# Altium PCB PCB_RTL8367S-4GE+SFP_2024-02-06.pcbdoc
Units mm, origin at the board's own origin, x right, y up, seen from the top; angles counter-clockwise.
Board outline 139.51 x 91.6 mm, 2 copper layers (Top Layer, Bottom Layer); 84 components, 93 nets, 429 pads, 192 vias.
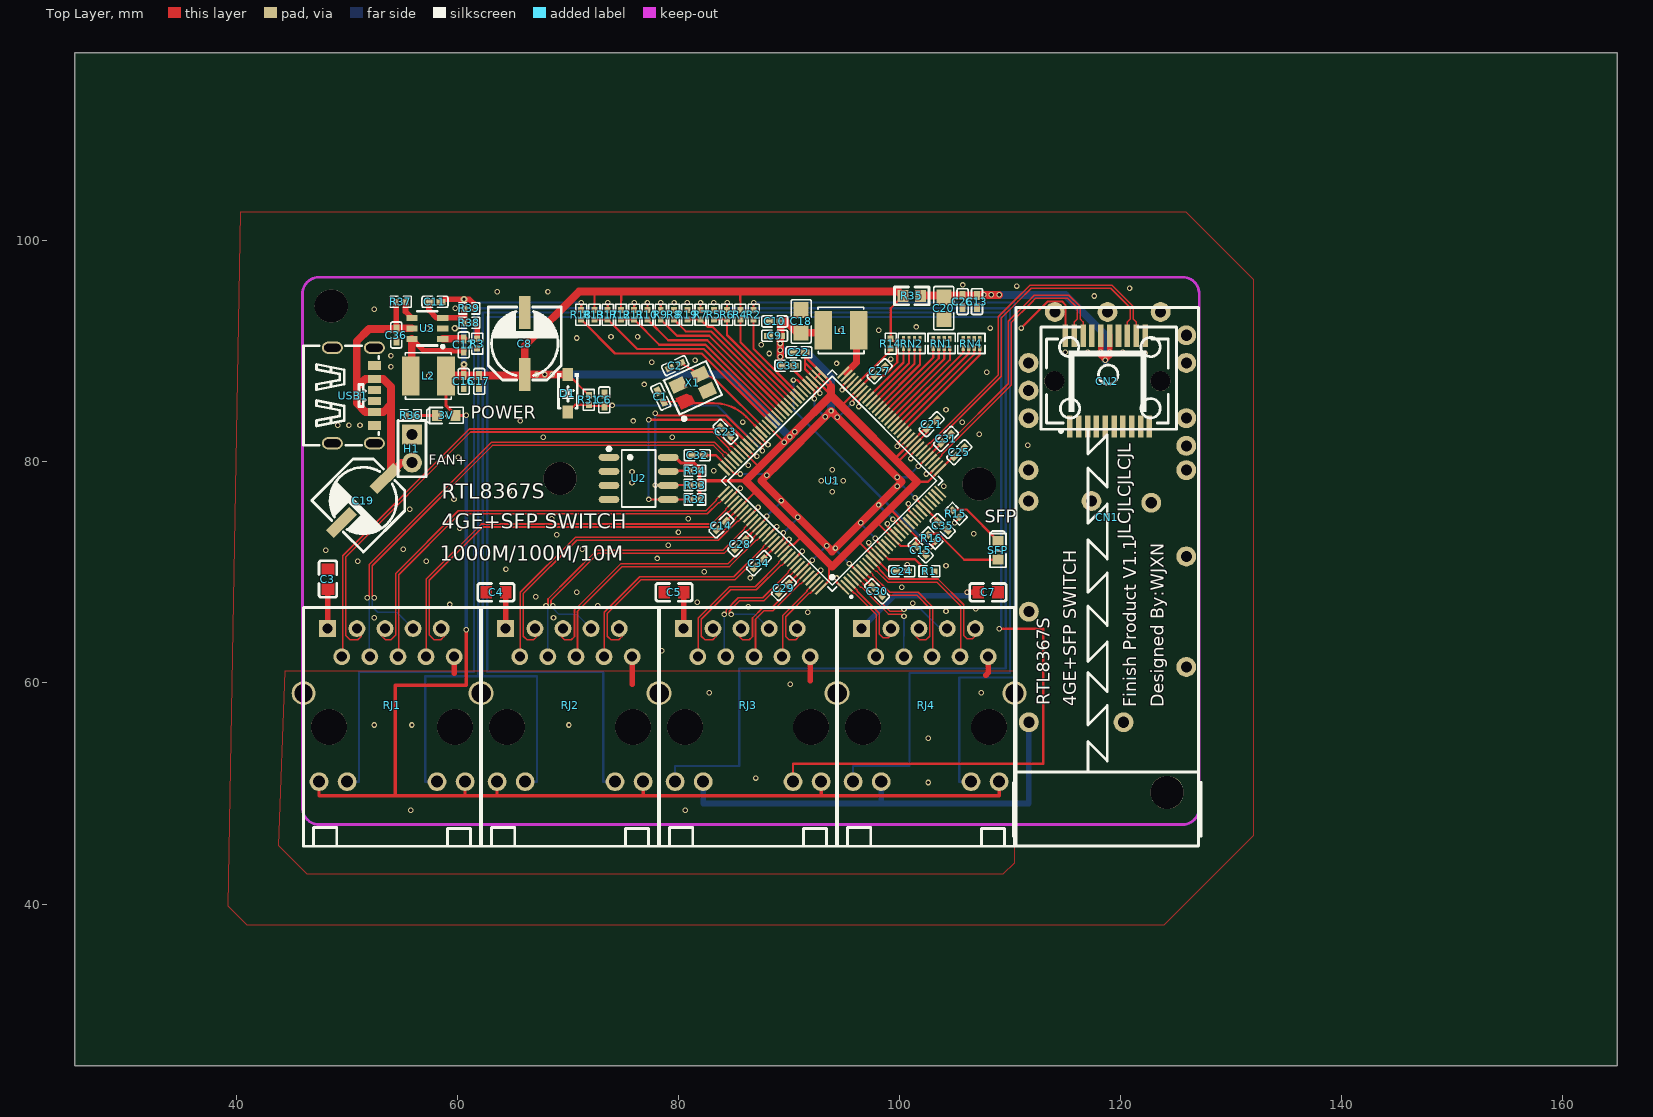
[diagram p0: Top Layer view]
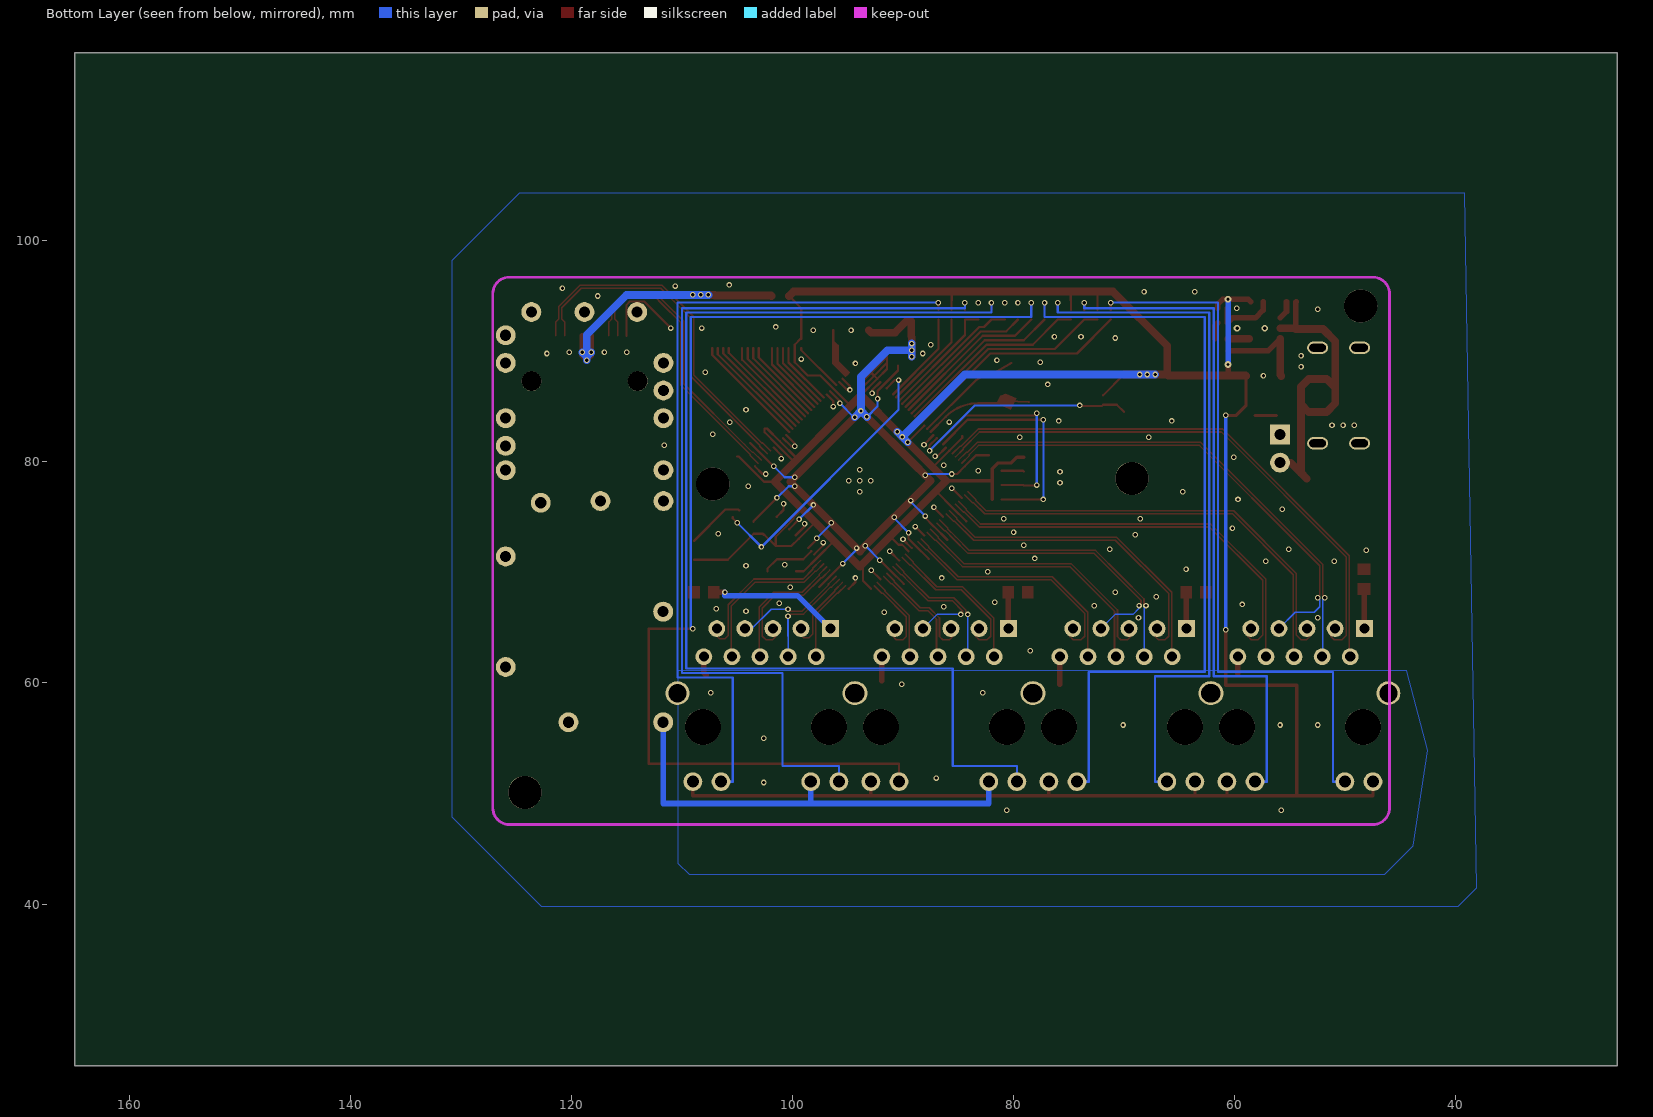
[diagram p1: Bottom Layer view, seen from below]

## Layer stack, top to bottom
Top Layer: signal copper (thickness not stored)
Dielectric: dielectric 0.32, FR-4, Dk 4.8
Bottom Layer: signal copper (thickness not stored)

## Board outline
164.909,25.4 25.4,25.4 25.4,117 164.909,117

## Components (designator, comment, footprint, x,y, rotation, side; value= is the part's Value field where it differs from the comment)
3V "LED-0603_OR" LED0603_RED 59,84.2 r180 top
C1 "22PF" C0402_NEW#1 78.4,85.9 r115 top
C2 "22PF" C0402_NEW#1 79.7,88.7 r25 top
C3 "10nf" C0603 48.3,69.4 r270 top
C4 "10nf" C0603 63.5,68.2 r0 top
C5 "10nf" C0603 79.6,68.2 r0 top
C6 "0.1uf" C0402_NEW#1 73.3,85.6 r90 top
C7 "10nf" C0603 108,68.2 r180 top
C8 "220uF" CAP-SMD_BD6.3-L6.6-W6.6-FD 66.1,90.7 r90 top
C9 "0.1uf" C0402_NEW#1 88.7,91.4 r180 top
C10 "10nf" C0402_NEW#1 88.7,92.7 r180 top
C11 "22pf" C0402_NEW#1 57.982,94.472 r180 top
C12 "22nf" C0402_NEW#1 60.582,90.572 r270 top
C13 "0.1uf" C0402_NEW#1 107,94.5 r90 top
C14 "0.1uf" C0402_NEW#2 83.89,74.24 r225 top
C15 "0.1uf" C0402_NEW#2 101.9,72 r315 top
C16 "0.1uf" C0402_NEW#1 60.582,87.272 r90 top
C17 "10nf" C0402_NEW#1 61.982,87.272 r90 top
C18 "10uf" C0805#1 91.1,92.7 r270 top
C19 "220uF" CAP-SMD_BD6.3-L6.6-W6.6-FD 51.501,76.5 r225 top
C20 "10uf" C0805#2 104,93.9 r90 top
C21 "0.1uf" C0402_NEW#2 102.9,83.4 r45 top
C22 "0.1uf" C0402_NEW#2 90.9,89.9 r180 top
C23 "0.1uf" C0402_NEW#2 84.26,82.72 r135 top
C24 "0.1uf" C0402_NEW#2 100.2,70.1 r0 top
C25 "0.1uf" C0402_NEW#2 105.39,80.87 r45 top
C26 "10nf" C0402_NEW#1 105.7,94.5 r90 top
C27 "0.1uf" C0402_NEW#2 98.2,88.2 r45 top
C28 "0.1uf" C0402_NEW#2 85.59,72.54 r225 top
C29 "0.1uf" C0402_NEW#2 89.54,68.58 r225 top
C30 "0.1uf" C0402_NEW#2 97.96,68.29 r315 top
C31 "0.1uf" C0402_NEW#2 104.2,82.08 r45 top
C32 "0.1uf" C0402_NEW#2 81.7,80.6 r180 top
C33 "0.1uf" C0402_NEW#2 89.9,88.7 r180 top
C34 "0.1uf" C0402_NEW#2 87.28,70.84 r225 top
C35 "0.1uf" C0402_NEW#2 103.9,74.2 r315 top
C36 "0.1uf" C0402_NEW#1 54.482,91.472 r90 top
CN1 "SFP_SHIELD" CONN-TH_46012-000001 118.8,75 r90 top
CN2 "KSP20LG154" CONN-SMD_20P-P0.80-H_KSPXXXXXXX-XX 118.8,87.3 r0 top
D1 "1N4148" SOD-123_L2.7-W1.6-LS3.7-RD-1 70,86.2 r270 top
H1 "FAN" HDR-TH_2P-P2.54-V-M-1 55.9,81.2 r270 top
L1 "2.2uH" IND-SMD_L4.0-W4.0 94.7,91.9 r180 top
L2 "4.7uH" IND-SMD_L4.0-W4.0 57.382,87.772 r0 top
R1 "2.49k" R0402 102.7,70.1 r180 top
R2 "470R" R0402 86.8,93.3 r270 top
R3 "2k" R0402 61.8,90.7 r270 top
R4 "4.7K" R0402 85.6,93.3 r270 top
R5 "4.7K" R0402 83.2,93.3 r270 top
R6 "470R" R0402 84.4,93.3 r270 top
R7 "470R" R0402 82,93.3 r270 top
R8 "4.7K" R0402 79.6,93.3 r270 top
R9 "470R" R0402 78.4,93.3 r270 top
R10 "470R" R0402 77.2,93.3 r270 top
R11 "470R" R0402 76,93.3 r270 top
R12 "4.7K" R0402 74.8,93.3 r270 top
R13 "4.7K" R0402 72.4,93.3 r270 top
R14 "1k" R0402 99.2,90.7 r270 top
R15 "1K" R0402 105.1,75.299 r135 top
R16 "4.7K" R0402 102.9,73.1 r315 top
R17 "470R" R0402 73.6,93.3 r270 top
R18 "470R" R0402 71.2,93.3 r270 top
R19 "4.7K" R0402 80.8,93.3 r270 top
R31 "100K" R0402 71.9,85.6 r270 top
R32 "1.5K" R0402 81.5,76.6 r0 top
R33 "1.5K" R0402 81.5,77.9 r0 top
R34 "1.5K" R0402 81.5,79.2 r0 top
R35 "0R" R0603 101.1,95 r0 top
R36 "1K" R0402 55.8,84.2 r180 top
R37 "10k" R0402 54.882,94.472 r0 top
R38 "2k" R0402 61.082,92.571 r0 top
R39 "18k" R0402 61.082,93.872 r180 top
RJ1 "HR911130A" RJ45-TH_HR911130A 54.1,58 r180 top
RJ2 "HR911130A" RJ45-TH_HR911130A 70.2,58 r180 top
RJ3 "HR911130A" RJ45-TH_HR911130A 86.3,58 r180 top
RJ4 "HR911130A" RJ45-TH_HR911130A 102.4,58 r180 top
RN1 "1kΩ" RES-ARRAY-SMD_0402-8P-L2.0-W1.0-BL 103.8,90.7 r0 top
RN2 "1kΩ" RES-ARRAY-SMD_0402-8P-L2.0-W1.0-BL 101.1,90.7 r0 top
RN4 "1kΩ" RES-ARRAY-SMD_0402-8P-L2.0-W1.0-BL 106.5,90.7 r0 top
SFP "RED" LED0603_GREEN 108.9,72 r90 top
U1 "RTL8367S-CG" LQFP-128_L14.0-W14.0-P0.40-LS16.0-BL 93.9,78.3 r45 top
U2 "24C64" SOP-8_L4.9-W3.9-P1.27-LS6.0-BL 76.4,78.5 r270 top
U3 "MT2492" SOT-23-6_L2.9-W1.6-P0.95-LS2.8-BR 57.282,92.072 r0 top
USB1 "TYPE-C 6P" TYPE-C-SMD_TYPE-C-6P 50.6,86 r270 top
X1 "25MHz" OSC-SMD_4P-L3.2-W2.5-BL 81.3,86.7 r25 top

## Footprints (in the part's own frame and the unit in brackets; to place one, negate y for a bottom-side part, rotate by r counter-clockwise, add the part's x,y. Pads: shape width x height; smd on the part's side, far side on the other; paste and mask are expansions set on the pad)
C0402_NEW#1 [mm]
  rect 0.79x0.54 smd paste-100 mask+0.051: 1(-0.545,0) 2(0.545,0)
  silkscreen extent -1.17,-0.5 1.17,0.5
C0402_NEW#2 [mm]
  rect 0.79x0.5 smd paste-100 mask+0.051: 1(-0.545,0) 2(0.545,0)
  silkscreen extent -1.17,-0.5 1.17,0.5
C0603 [mm]
  Top Layer region: 1.4,0.55 1.4,-0.55 0.4,-0.55 0.4,0.55
  Top Layer region: -0.4,-0.55 -1.4,-0.55 -1.4,0.55 -0.4,0.55
  silkscreen extent -1.65,-0.8 1.65,0.8
C0805#1 [mm]
  rect 1.41x1.35 smd paste-100 mask+0.051: 1(-1.03,0) 2(1.03,0)
  silkscreen extent -1.96,-0.9 1.96,0.9
C0805#2 [mm]
  rect 1.41x1.35 smd paste-100 mask+0.051: 1(-1,0) 2(1,0)
  silkscreen extent -1.96,-0.9 1.96,0.9
CAP-SMD_BD6.3-L6.6-W6.6-FD [mm]
  rect 3x1 smd paste+0 mask+0.102: 1(-2.8,0) 2(2.8,0)
  silkscreen extent -3.3,-3.3 3.3,3.3
CONN-SMD_20P-P0.80-H_KSPXXXXXXX-XX [mm]
  rect 0.5x2 smd paste+0 mask+0.051: 1(-3.4,-4.1) 2(-2.6,-4.1) 3(-1.8,-4.1) 4(-1,-4.1) 5(-0.2,-4.1) 6(0.6,-4.1) 7(1.4,-4.1) 8(2.2,-4.1) 9(3,-4.1) 10(3.8,-4.1) 11(3.4,4.1) 12(2.6,4.1) 13(1.8,4.1) 14(1,4.1) 15(0.2,4.1) 16(-0.6,4.1) 17(-1.4,4.1) 18(-2.2,4.1) 19(-3,4.1) 20(-3.8,4.1)
  round 1.8 hole 1.8 unplated paste+0: ""(-4.8,0) ""(4.8,0)
  silkscreen extent -5.5,-4.64 5.5,3.8
CONN-TH_46012-000001 [mm]
  round 1.8 hole 1 paste+0 mask+0.051: 1(-18.55,7.11) 2(-8.55,7.11) 3(1.45,7.131) 4(4.25,7.132) 5(8.95,7.129) 6(11.45,7.13) 7(13.95,7.13) 8(18.55,4.76) 9(18.55,-0.011) 10(18.55,-4.811) 11(16.45,-7.131) 12(13.95,-7.131) 13(8.95,-7.131) 14(6.45,-7.131) 15(4.25,-7.131) 16(-3.55,-7.131) 17(-13.55,-7.131) 18(-18.55,-1.461) 19(1.3,-3.961) 20(1.45,1.439)
  silkscreen extent -29.75,-8.49 18.95,8.5
HDR-TH_2P-P2.54-V-M-1 [mm]
  rect 1.8x1.8 hole 1 paste+0 mask+0.051: 1(-1.27,0)
  round 1.8 hole 1 paste+0 mask+0.051: 2(1.27,0)
  silkscreen extent -2.54,-1.27 2.54,1.27
IND-SMD_L4.0-W4.0 [mm]
  rect 1.6x3.5 smd paste+0 mask+0.051: 1(-1.6,0) 2(1.6,0)
  silkscreen extent -2.08,-2.1 2.08,2.1
LED0603_GREEN [mm]
  rect 0.9x1 smd paste+0 mask+0.051: 1(-0.85,0) 2(0.85,0)
  silkscreen extent -1.54,-0.73 1.75,0.73
LED0603_RED [mm]
  rect 0.9x1 smd paste+0 mask+0.051: 1(-0.85,0) 2(0.85,0)
  silkscreen extent -1.54,-0.73 1.75,0.73
LQFP-128_L14.0-W14.0-P0.40-LS16.0-BL [mm]
  rect 0.2x1.46 smd paste+0 mask+0.051: 1(-6.2,-7.63) 2(-5.8,-7.63) 3(-5.4,-7.63) 4(-5,-7.63) 5(-4.6,-7.63) 6(-4.2,-7.63) 7(-3.8,-7.63) 8(-3.4,-7.63) 9(-3,-7.63) 10(-2.6,-7.63) 11(-2.2,-7.63) 12(-1.8,-7.63) 13(-1.4,-7.63) 14(-1,-7.63) 15(-0.6,-7.63) 16(-0.2,-7.63) 17(0.2,-7.63) 18(0.6,-7.63) 19(1,-7.63) 20(1.4,-7.63) 21(1.8,-7.63) 22(2.2,-7.63) 23(2.6,-7.63) 24(3,-7.63) 25(3.4,-7.63) 26(3.8,-7.63) 27(4.2,-7.63) 28(4.6,-7.63) 29(5,-7.63) 30(5.4,-7.63) 31(5.8,-7.63) 32(6.2,-7.63) 65(6.2,7.63) 66(5.8,7.63) 67(5.4,7.63) 68(5,7.63) 69(4.6,7.63) 70(4.2,7.63) 71(3.8,7.63) 72(3.4,7.63) 73(3,7.63) 74(2.6,7.63) 75(2.2,7.63) 76(1.8,7.63) 77(1.4,7.63) 78(1,7.63) 79(0.6,7.63) 80(0.2,7.63) 81(-0.2,7.63) 82(-0.6,7.63) 83(-1,7.63) 84(-1.4,7.63) 85(-1.8,7.63) 86(-2.2,7.63) 87(-2.6,7.63) 88(-3,7.63) 89(-3.4,7.63) 90(-3.8,7.63) 91(-4.2,7.63) 92(-4.6,7.63) 93(-5,7.63) 94(-5.4,7.63) 95(-5.8,7.63) 96(-6.2,7.63)
  rect 1.46x0.2 smd paste+0 mask+0.051: 33(7.63,-6.2) 34(7.63,-5.8) 35(7.63,-5.4) 36(7.63,-5) 37(7.63,-4.6) 38(7.63,-4.2) 39(7.63,-3.8) 40(7.63,-3.4) 41(7.63,-3) 42(7.63,-2.6) 43(7.63,-2.2) 44(7.63,-1.8) 45(7.63,-1.4) 46(7.63,-1) 47(7.63,-0.6) 48(7.63,-0.2) 49(7.63,0.2) 50(7.63,0.6) 51(7.63,1) 52(7.63,1.4) 53(7.63,1.8) 54(7.63,2.2) 55(7.63,2.6) 56(7.63,3) 57(7.63,3.4) 58(7.63,3.8) 59(7.63,4.2) 60(7.63,4.6) 61(7.63,5) 62(7.63,5.4) 63(7.63,5.8) 64(7.63,6.2) 97(-7.63,6.2) 98(-7.63,5.8) 99(-7.63,5.4) 100(-7.63,5) 101(-7.63,4.6) 102(-7.63,4.2) 103(-7.63,3.8) 104(-7.63,3.4) 105(-7.63,3) 106(-7.63,2.6) 107(-7.63,2.2) 108(-7.63,1.8) 109(-7.63,1.4) 110(-7.63,1) 111(-7.63,0.6) 112(-7.63,0.2) 113(-7.63,-0.2) 114(-7.63,-0.6) 115(-7.63,-1) 116(-7.63,-1.4) 117(-7.63,-1.8) 118(-7.63,-2.2) 119(-7.63,-2.6) 120(-7.63,-3) 121(-7.63,-3.4) 122(-7.63,-3.8) 123(-7.63,-4.2) 124(-7.63,-4.6) 125(-7.63,-5) 126(-7.63,-5.4) 127(-7.63,-5.8) 128(-7.63,-6.2)
  silkscreen extent -7.08,-8.76 7.08,7.08
OSC-SMD_4P-L3.2-W2.5-BL [mm]
  rect 1.4x1.15 smd paste+0 mask+0.102: 2(1.1,-0.8) 3(1.1,0.8) 4(-1.1,0.8)
  Top Layer region: -1.8,-0.225 -0.762,-0.225 -0.4,-0.604 -0.4,-1.375 -1.8,-1.375
  silkscreen extent -2.1,-2.35 2.1,1.7
R0402 [mm]
  rect 0.566x0.54 smd paste-100 mask+0.051: 1(-0.433,0) 2(0.433,0)
  silkscreen extent -0.94,-0.5 0.94,0.5
R0603 [mm]
  rect 1x1.1 smd paste+0 mask+0.102: 1(-0.8,0) 2(0.8,0)
  silkscreen extent -1.55,-0.8 1.55,0.81
RES-ARRAY-SMD_0402-8P-L2.0-W1.0-BL [mm]
  rect 0.3x0.505 smd paste+0 mask+0.051: 1(-0.75,0.427) 2(-0.25,0.427) 3(0.25,0.427) 4(0.75,0.427) 5(0.75,-0.428) 6(0.25,-0.428) 7(-0.25,-0.428) 8(-0.75,-0.428)
  silkscreen extent -1.23,-0.91 1.23,0.91
RJ45-TH_HR911130A [mil]
  round 66.93 hole 43.31 paste+0 mask+2: 11(260,272.62) 12(160,272.62) 13(-160,272.62) 14(-260,272.62)
  rect 60x60 hole 35.83 paste+0 mask+2: P1(229.63,-272.62)
  round 60 hole 35.83 paste+0 mask+2: P2(179.1,-172.38) P3(125.2,-272.38) P4(79.1,-172.38) P5(25.2,-272.38) P6(-20.9,-172.38) P7(-74.8,-272.38) P8(-120.9,-172.38) P9(-174.8,-272.38) P10(-220.9,-172.38)
  round 85 hole 65 paste+0 mask+2: SHIELD0(-315,-42.48) SHIELD1(315,-42.48)
  round 127.95 hole 127.95 unplated paste+0: ""(-224.4,77.62) ""(224.4,77.62)
  silkscreen extent -315,-347 315,503
SOD-123_L2.7-W1.6-LS3.7-RD-1 [mm]
  rect 1.2x0.95 smd paste+0 mask+0.051: 1(-1.7,0) 2(1.7,0)
  silkscreen extent -1.81,-0.98 1.35,0.98
SOP-8_L4.9-W3.9-P1.27-LS6.0-BL [mm]
  oval 0.63x1.865 smd paste+0 mask+0.051: 1(-1.905,-2.682) 2(-0.635,-2.682) 3(0.635,-2.682) 4(1.905,-2.682) 5(1.905,2.682) 6(0.635,2.682) 7(-0.635,2.682) 8(-1.905,2.682)
  silkscreen extent -2.82,-2.83 2.58,1.52
SOT-23-6_L2.9-W1.6-P0.95-LS2.8-BR [mm]
  rect 1x0.55 smd paste+0 mask+0.051: 1(1.4,-0.95) 2(1.4,0) 3(1.4,0.95) 4(-1.4,0.95) 5(-1.4,0) 6(-1.4,-0.95)
  silkscreen extent -0.9,-1.78 1.52,1.55
TYPE-C-SMD_TYPE-C-6P [mm]
  oval 1.1x1.9 hole 0.7 slot 1.5 at 90 deg paste+0 mask+0.051: 7(-4.32,-1.9) 7(-4.32,1.9) 7(4.32,-1.9) 7(4.32,1.9)
  rect 0.7x1.2 smd paste-100 mask+0.051: A5(-0.5,1.9) A9(1.5,1.9) B5(0.5,1.9) B9(-1.5,1.9)
  rect 0.8x1.2 smd paste-100 mask+0.051: A12(2.7,1.9) B12(-2.7,1.9)
  silkscreen extent -4.5,-4.5 4.5,2.3

## Free pads (board coordinates)
  round 3 hole 3 unplated paste+0: ""(48.6,94.1) ""(69.3,78.5) ""(107.2,78) ""(124.2,50.1)

## Via types
v1: diameter 0.5, hole 0.305, Top Layer to Bottom Layer, tented both sides, 128 vias
v2: diameter 0.5, hole 0.3, Top Layer to Bottom Layer, tented both sides, 60 vias
v3: diameter 0.61, hole 0.305, Top Layer to Bottom Layer, tented both sides, 4 vias

## Nets (pads, with @x,y where several pads share a name; then routed paths per layer and width w, separated by ;. In a path a pad name is that pad's centre, name@x,y a point inside that pad or via, vN(x,y) a via of type N, cw(c..) or ccw(c..) an arc to the next point about the centre after c; other vN are vias at no path point)
1V1: C9.1 C10.1 C18.2 C28.1 C29.1 C30.1 C31.1 C32.1 C33.1 C34.1 C35.1 L1.2 U1.6 U1.14 U1.20 U1.27 U1.37 U1.58 U1.69 U1.95 U1.108 U1.114 U1.122 | length 107.2
  Top Layer w0.2: C32.1 83.397,80.6 U1.95 ; U1.95 85.098,78.9 v2(85.6,78.9) ; C28.1@85.976,72.924 U1.108@87.231,74.176 ; U1.108 88,74.946 v2(88,75.1) ; C34.1 U1.114@88.928,72.48 ; U1.114 89.5,73.051 v2(89.5,73.6) ; C29.1@89.926,68.964 U1.122@91.191,70.217 ; C33.1 90.445,88.26 U1.69 92.3,86.405 v2(92.3,85.7) ; U1.122 92.074,71.1 v2(92.1,71.1) ; v2@95.4,70.8 v2(95.461,70.8) U1.6@96.325,69.935 ; v2(95.7,85.3) 95.7,85.474 U1.58 ; U1.6 C30.1@97.574,68.675 ; v2(97.8,73.1) 97.8,72.986 U1.14 ; v2@99.4,74.799 U1.20 ; v2@101.4,76.8 v2(101.4,76.74) U1.27 103.514,74.625 C35.1 ; v2(101.7,79.6) 101.705,79.6 U1.37 ; U1.37 C31.1
  Top Layer w0.7: v2(88,78.8) 89,79.8 ; v2@88.001,78.799 87.5,78.299 93.899,71.901 100.2,78.2 v2(94.356,84.045) v2(93.8,84.601) v2(93.264,84.065) 88.999,79.8 ; v2(89.2,89.5) 89.2,91.245 C9.1 89.245,92.5 C10.1 ; C10.1 89.7,92.701 90.729,91.669 91.1,91.669 92.87,91.67 L1.2@93.1,91.9
  Bottom Layer w0.2: v2(85.6,78.9) 87.9,78.9 v2(88,78.8) ; v2(88,75.1) 89.3,76.4 v2(89.3,76.5) ; v2(89.5,73.6) 90.8,74.9 v2(90.8,75) ; v2(92.1,71.1) v2(93.4,72.4) ; v2(92.3,85.7) 92.301,85.03 v2@93.264,84.065 ; v2(94.2,72.2) 94.2,72.061 v2(95.461,70.8) ; v2(94.356,84.045) 94.445,84.045 v2(95.7,85.3) ; v2(96.5,74.5) 96.5,74.4 v2(97.8,73.1) ; v2(98.1,76.1) v2(99.4,74.8) ; v2(99.8,77.8) 100.34,77.8 v2(101.4,76.74) ; v2(99.8,78.6) 100.7,78.6 v2@101.7,79.6
  Bottom Layer w0.7: v2(89.2,89.5) 89.2,89.7 v2(89.2,90.7) ; v2(89.2,90.1) 91.399,90.1 93.8,87.699 v2(93.8,84.601) ; v2(93.264,84.065) v2(93.8,84.601) ; v2(94.356,84.045) v2(93.8,84.601)
3V3: 3V.1 C8.1 C11.1 C14.1 C15.1 C16.2 C17.2 C21.1 C22.1 C23.1 C24.1 C25.1 C27.1 D1.1 L2.2 R4.1 R12.1 R13.1 R14.1 R16.1 R31.1 R32.2 R33.2 R34.2 R35.1 R39.1 RJ1.11 RJ1.14 RJ2.11 RJ2.14 RJ3.14 RJ4.14 SFP.1 U1.11 U1.17 U1.21 U1.33 U1.41 U1.42 U1.59 U1.65 U1.66 U1.67 U1.82 U1.90 U1.102 U1.116 U1.128 U2.8 | length 350.7
  Top Layer w0.2: D1.1 70.033,87.9 R31.1 ; R13.1@72.4,93.732 72.413,95.401 ; R12.1@74.8,93.732 74.821,95.401 ; C14.1 U1.102 ; C23.1 84.645,82.18 U1.90 87.228,79.597 87.399,79.597 ; U1.102 86.95,77.29 87.11,77.29 ; 85.585,95.401 R4.1@85.6,93.732 ; U1.82 89.535,81.817 v1@89.535,81.734 ; U1.116 90.08,72.5 90.4,72.5 91.067,73.167 91.067,73.333 ; U1.128 93.626,69.258 93.626,70.774 ; 93.8,86.8 93.8,87.168 U1.65 ; 94.739,85.063 U1.59 ; 96.227,72.829 96.26,72.829 U1.11 98.989,70.1 C24.1 ; U1.59 97.475,87.814 C27.1 ; C27.1@97.815,87.814 98.615,87.814 99.799,89 99.799,90.6 99.266,91.133 R14.1 ; 97.897,74.498 97.985,74.498 U1.17 100.097,72.385 C15.1 ; 99.076,75.677 99.223,75.677 99.9,75 99.9,74.846 U1.21 101.515,73.231 C15.1 ; R14.1 99.2,93.9 R35.1 ; 99.628,80.171 99.628,80.351 U1.42 102.291,83.014 C21.1 102.515,82.672 U1.41 99.946,80.103 99.697,80.103 ; 101.6,78.2 102.568,78.2 103.679,79.311 104.852,80.484 C25.1 ; SFP.1 105.85,71.15 103.5,73.5 102.688,73.5 R16.1 102.535,73.406 C15.1 ; C22.1 91.445,88.391 U1.67 ; C22.1 91.445,88.957 92.606,87.796 93.8,86.603 93.8,86 93.8,86.037 U1.67 ; C22.1 91.445,89.523 U1.65 ; U1.67 U1.65
  Top Layer w0.3: RJ1.11 47.495,49.8 109.004,49.8 RJ4.14 ; 56.274,49.8 54.399,49.8 54.399,59.8 60.8,59.8 v1(60.8,64.8) ; 58.715,49.8 60.703,49.8 RJ1.14 ; L2.2 58.982,85.068 3V.1 v1(60.8,84.2) ; 62.832,49.8 63.596,49.8 RJ2.11 ; 75.804,49.8 76.804,49.8 RJ2.14 ; U2.8 79.695,80.404 80.2,79.899 81.399,79.899 81.933,79.368 R34.2 ; R32.2 R34.2 ; R33.2 81.933,78.299 86.101,78.299 ; 92.144,49.8 92.903,49.8 RJ3.14
  Top Layer w0.5: C11.1@58.527,94.471 58.755,94.7 61.1,94.7 61.514,94.286 R39.1@61.514,93.872 ; v3@60.599,88.799 60.599,87.816 C17.2@61.981,87.816
  Top Layer w0.7: L2.2 59.027,87.817 C17.2 66.017,87.817 C8.1 ; D1.1 v1(68.6,87.9) C8.1 66.101,90.501 71.001,95.401 99.901,95.401 R35.1@100.299,94.999 ; 93.8,86.8 93.8,86 ; 93.8,86 101.6,78.2 93.899,70.501 86.101,78.299 v1(89.563,81.762) v1(90.052,82.251) v1(90.532,82.731) 93.8,86
  Bottom Layer w0.3: v1(60.8,64.8) v1(60.8,84.2)
  Bottom Layer w0.5: v3(60.6,88.8) v3(60.6,94.7)
  Bottom Layer w0.7: v1(67.2,87.9) v1(67.9,87.9) v1(68.6,87.9) 84.403,87.9 v1(90.052,82.251) ; v1@89.563,81.761 v1(90.532,82.731)
GND: C1.2 C2.1 C6.2 C8.2 C9.2 C10.2 C13.1 C14.2 C15.2 C16.1 C17.1 C18.1 C19.2 C20.1 C21.2 C22.2 C23.2 C24.2 C25.2 C26.1 C27.2 C28.2 C29.2 C30.2 C31.2 C32.2 C33.2 C34.2 C35.2 C36.1 CN1.1 CN1.2 CN1.3 CN1.4 CN1.5 CN1.6 CN1.7 CN1.8 CN1.9 CN1.10 CN1.11 CN1.12 CN1.13 CN1.14 CN1.15 CN1.16 CN1.17 CN1.18 CN1.19 CN1.20 CN2.1 CN2.3 CN2.6 CN2.9 CN2.10 CN2.11 CN2.14 CN2.17 CN2.20 H1.1 R1.1 R3.2 R5.1 R8.1 R19.1 R36.2 RJ3.12 RJ4.12 RN1.1 RN1.2 RN1.3 RN1.4 RN2.1 RN2.2 RN2.3 RN2.4 RN4.1 RN4.2 RN4.3 RN4.4 U1.1 U1.12 U1.18 U1.24 U1.32 U1.34 U1.40 U1.43 U1.44 U1.57 U1.61 U1.62 U1.68 U1.85 U1.89 U1.96 U1.99 U1.105 U1.111 U1.115 U1.119 U1.125 U2.1 U2.2 U2.3 U2.4 U3.2 USB1.7 USB1.A12 USB1.B12 X1.2 X1.4 | length 76.5
  Top Layer w0.19: v1(111,92.1) 113.401,94.499 114.699,94.499 114.998,94.199 CN2.20@114.998,91.4
  Top Layer w0.2: U1.99 85.563,77.6 v2(85.6,77.6) ; U1.89 86.892,80.5 v2(87.1,80.5) ; U1.105 87.2,75.843 v2(87.2,75.9) ; U1.85 v2(88.1,81.554) v2@88.1,81.5 ; U1.111 v2(88.9,74.148) v2@88.9,74.2 ; U1.115 90,72.986 v2(90,73) ; U1.119 91.177,71.9 v2(91.2,71.9) ; U1.125 v2(92.871,70.2) v2@92.9,70.2 ; U1.68 92.8,86.471 v2(92.8,86.2) ; v2(94.3,69.5) 94.3,69.132 U1.1 ; U1.62 94.8,86.837 v2(94.8,86.5) 95.029,86.5 U1.61 ; v2(96.3,85) 96.3,85.508 U1.57 ; v2(97.2,72.7) 97.2,72.454 U1.12 ; v2(98.9,74.4) 98.9,74.148 U1.18 ; U1.44 99.8,81.654 v2(99.8,81.4) 100.111,81.4 U1.43 ; v2(100.8,76.2) 100.8,75.643 U1.24 ; v2(101,80.3) 101,80.592 U1.40 ; v2(102.4,78.9) 102.703,78.9 U1.34
  Bottom Layer w0.5: RJ3.12 82.235,49.099 98.336,49.099 ; CN1.1 111.689,49.099 98.336,49.099 ; 98.336,49.099 RJ4.12 98.336,49.099
  other v1: 78.5,62.9 52.5,65.9 68.7,65.9 91.7,66.4 104.2,66.5 106.9,66.7 86.3,66.9 72.7,67 59.3,67.1 101.2,67.2 81.7,67.3 67.1,67.8 70.8,68.2 100.19,68.67 86.5,69.5 82.33,70.06 64.4,70.3 104.2,70.6 100.7,70.7 51,71 57.2,71 78.07,71.26 48.1,72 55.1,72.1 71.3,72.1 79.08,72.45 69,73.4 106.7,73.5 80,73.64 60.2,74 68.55,74.84 80.88,74.84 55.7,75.7 59.7,76.6 64.7,77.3 93.9,77.3 104,77.8 75.8,78.1 92.9,78.3 93.9,78.3 94.9,78.3 75.8,79.1 83.2,79.2 93.9,79.3 86.3,79.7 60.1,80.4 111.6,81.5 67.78,82.22 79.448,82.215 107.2,82.5 49.2,83.3 50.2,83.3 51.2,83.3 105.68,83.57 85.8,83.6 65.7,83.7 75.9,83.7 104.2,84.7 76.9,87 57.4,87.8 107.9,88.1 54,88.6 94.3,88.9 77.6,89 81.5,89.2 99.2,89.3 54,89.6 88.2,89.8 122.2,89.8 115,89.9 117,89.9 120.2,89.9 87.5,90.6 70.8,91.2 73.9,91.3 76.3,91.3 94.7,91.9 98.1,91.9 108.2,92.1 101.5,92.2 52.5,93.8 59.8,93.9 79.6,94.4 80.8,94.4 83.2,94.4 117.6,95 63.6,95.4 68.2,95.4 120.8,95.7 110.6,95.9 105.7,96
  other v3: 57.282,92.072 59.782,92.072
HSI_N: CN2.12 U1.39 | length 32
  Top Layer w0.142: U1.39 102.678,81.704 102.768,81.704 103.487,82.422 108.928,87.863 108.928,92.4 108.928,93.113 110.428,94.613 111.787,95.972 113.8,95.972 119.21,95.972 121.136,94.047 121.136,92.918 121.4,92.654 CN2.12
HSI_P: CN2.13 U1.38 | length 31.3
  Top Layer w0.142: U1.38 102.961,81.421 102.961,81.511 103.679,82.23 109.2,87.751 109.2,92.4 109.2,93 110.7,94.5 111.9,95.7 113.8,95.7 119.098,95.7 120.864,93.934 120.864,92.918 120.6,92.654 CN2.13
HSO_N: CN2.19 U1.35 | length 25.5
  Top Layer w0.142: U1.35 103.809,80.572 103.809,80.663 104.528,81.381 110.1,86.954 110.1,92.4 110.1,92.6 111.9,94.4 112.3,94.8 114.8,94.8 115.198,94.8 116.064,93.934 116.064,92.918 115.8,92.654 CN2.19
HSO_P: CN2.18 U1.36 | length 26.2
  Top Layer w0.142: U1.36@102.831,80.16 103.526,80.855 103.617,80.855 104.335,81.574 109.828,87.066 109.828,92.4 109.828,92.713 111.628,94.513 112.187,95.072 114.8,95.072 115.31,95.072 116.336,94.046 116.336,92.918 116.6,92.654 CN2.18
L2_1: C12.2 L2.1 U3.6 | length 8.5
  Top Layer w0.5: U3.6 56.977,90.027 C12.2
  Top Layer w0.7: L2.1 55.882,87.872 U3.6
NRST: C6.1 D1.2 R31.2 U1.86 | length 21
  Top Layer w0.2: D1.2 70.667,85.167 R31.2 72.012,85.055 C6.1 73.955,85.055 v1(74,85.1) ; U1.86 87.6,81.489 v2(87.6,81)
  Bottom Layer w0.2: v1(74,85.1) 83.5,85.1 v2(87.6,81)
P0_LED_G-: R18.1 RJ1.12 | length 65.2
  Top Layer w0.2: R18.1 v1(71.2,94.4)
  Bottom Layer w0.2: RJ1.12 51.1,51.075 51.1,60.999 61.501,60.999 61.501,94.4 v1(71.2,94.4)
P0_LED_Y-: R17.1 RJ1.13 | length 61.6
  Top Layer w0.2: R17.1 v1(73.6,94.4)
  Bottom Layer w0.2: RJ1.13 57.099,51.075 57.099,60.6 61.9,60.6 61.9,93.899 73.599,93.899 v1(73.6,94.4)
P0A_RJ45_N: RJ1.P3 U1.92 | length 50.8
  Top Layer w0.142: RJ1.P3 51.082,64.918 51.3,64.7 51.3,64.199 51.001,63.9 50.3,63.9 49.901,64.301 49.901,71.4 61.199,82.701 83.086,82.701 84.557,81.23 84.557,81.139 U1.92
P0A_RJ45_P: RJ1.P2 U1.91 | length 50.9
  Top Layer w0.142: RJ1.P2 49.4,62.528 49.4,62.8 49.629,63.028 49.629,71.512 61.087,82.972 83.198,82.972 84.75,81.42 84.838,81.42 U1.91@85.534,80.725
P0B_RJ45_N: RJ1.P7 U1.94 | length 46
  Top Layer w0.142: v2(52.479,67.7) 52.3,67.879 52.3,70.6 53.8,72.1 63.183,81.483 83.17,81.483 83.272,81.381 83.991,80.663 83.991,80.572 U1.94
  Bottom Layer w0.142: v2@52.479,67.699 52.301,67.522 52.301,66.899 52.799,66.399 54.519,66.399 RJ1.P7
P0B_RJ45_P: RJ1.P4 U1.93 | length 46.8
  Top Layer w0.142: v2(51.849,67.7) 52.028,67.879 52.028,70.713 53.687,72.372 63.07,81.755 83.283,81.755 83.464,81.574 84.183,80.855 84.273,80.855 U1.93
  Bottom Layer w0.142: v2@51.849,67.699 52.027,67.522 52.027,62.972 52.199,62.8 52.199,62.487 RJ1.P4
P0C_RJ45_N: RJ1.P6 U1.98 | length 40.2
  Top Layer w0.142: RJ1.P6 54.63,62.47 54.501,62.599 54.501,62.701 54.699,62.899 54.699,69.8 60.2,75.299 82.606,75.299 83.617,76.31 83.708,76.31 U1.98
P0C_RJ45_P: RJ1.P5 U1.97 | length 40.8
  Top Layer w0.142: RJ1.P5 53.101,64.557 53.101,64.301 53.5,63.9 54,63.9 54.427,64.329 54.427,69.912 60.086,75.571 82.494,75.571 83.424,76.503 83.424,76.592 U1.97@84.12,77.288
P0D_RJ45_N: RJ1.P9 U1.101 | length 38
  Top Layer w0.142: RJ1.P9 58.801,64.659 58.801,64.199 58.501,63.9 57.899,63.9 57.473,64.329 57.473,69.287 62.293,74.108 83.111,74.108 84.465,75.462 84.557,75.462 U1.101
P0D_RJ45_P: RJ1.P8 U1.100 | length 38
  Top Layer w0.142: RJ1.P8 56.901,62.65 57.201,62.95 57.201,69.401 62.179,74.38 82.997,74.38 84.272,75.655 84.272,75.744 U1.100@84.971,76.44
P1_LED_G-: R11.1 RJ2.12 | length 63.7
  Top Layer w0.2: R11.1 v1(76,94.4)
  Bottom Layer w0.2: RJ2.12 67.201,51.075 67.201,60.6 62.301,60.6 62.301,93.501 75.999,93.501 v1(76,94.4)
P1_LED_Y-: R10.1 RJ2.13 | length 70.1
  Top Layer w0.2: R10.1 v1(77.2,94.4)
  Bottom Layer w0.2: RJ2.13 73.2,51.075 73.2,60.999 62.7,60.999 62.7,93.099 77.201,93.099 v1(77.2,94.4)
P1A_RJ45_N: RJ2.P3 U1.104 | length 29.3
  Top Layer w0.142: RJ2.P3 67.201,64.738 67.201,64.199 66.901,63.9 66.299,63.9 65.971,64.227 65.971,68.088 70.792,72.909 83.609,72.909 85.313,74.613 85.405,74.613 U1.104
P1A_RJ45_P: RJ2.P2 U1.103 | length 29.2
  Top Layer w0.142: RJ2.P2 65.499,62.53 65.499,62.701 65.7,62.899 65.7,68.2 70.681,73.181 83.497,73.181 85.123,74.806 85.123,74.895 U1.103@85.819,75.591
P1B_RJ45_N: RJ2.P7 U1.107 | length 26.4
  Top Layer w0.142: v2(68.651,67) 68.472,67.179 68.472,67.487 70.413,69.428 72.703,71.718 76.66,71.718 84.116,71.718 85.444,73.046 86.163,73.764 86.253,73.764 U1.107
  Bottom Layer w0.142: v2(68.651,67) 68.651,66.749 69.2,66.201 70.818,66.201 RJ2.P7
P1B_RJ45_P: RJ2.P4 U1.106 | length 27
  Top Layer w0.142: v2(68.021,67) 68.2,67.179 68.2,67.6 70.3,69.7 72.59,71.99 76.66,71.99 84.003,71.99 85.252,73.238 85.97,73.957 85.97,74.047 U1.106
  Bottom Layer w0.142: v2(68.021,67) 68.199,66.821 68.199,62.899 68.4,62.701 68.4,62.586 RJ2.P4
P1C_RJ45_N: RJ2.P6 U1.110 | length 24.2
  Top Layer w0.142: RJ2.P6 70.599,62.51 70.599,62.599 70.871,62.871 70.871,66.488 74.912,70.529 84.625,70.529 87.013,72.917 87.102,72.917 U1.110
P1C_RJ45_P: RJ2.P5 U1.109 | length 24.6
  Top Layer w0.142: RJ2.P5 69.4,64.758 69.4,64.199 69.7,63.9 70.3,63.9 70.599,64.199 70.599,66.6 74.8,70.801 84.511,70.801 86.82,73.107 86.82,73.198 U1.109
P1D_RJ45_N: RJ2.P9 U1.113 | length 22.2
  Top Layer w0.142: RJ2.P9 74.899,64.659 74.899,64.199 74.6,63.9 73.899,63.9 73.571,64.227 73.571,66.287 76.611,69.328 85.12,69.328 87.861,72.068 87.95,72.068 U1.113
P1D_RJ45_P: RJ2.P8 U1.112 | length 22
  Top Layer w0.142: RJ2.P8 73.101,62.548 73.101,62.8 73.299,63 73.299,66.399 76.5,69.599 85.009,69.599 87.668,72.259 87.668,72.35 U1.112
P2_LED_G+: R7.1 RJ3.11 | length 101.5
  Top Layer w0.2: R7.1 v1(82,94.4)
  Bottom Layer w0.2: RJ3.11 79.695,52.5 85.499,52.5 85.499,61.301 109.601,61.301 109.601,93.501 82.001,93.501 v1@82.001,94.4
P2_LED_Y-: R9.1 RJ3.13 | length 101.6
  Top Layer w0.2: R9.1 v1(78.4,94.4) ; RJ3.13 90.363,52.701 112.999,52.701 112.999,64.9 v1(109,64.9)
  Bottom Layer w0.2: v1(78.4,94.4) 78.4,93.1 109.2,93.1 109.2,64.9 v1(109,64.9)
P2A_RJ45_N: RJ3.P3 U1.118 | length 14.3
  Top Layer w0.142: RJ3.P3 83.401,64.639 83.401,64.199 83.101,63.9 82.4,63.9 82.072,64.227 82.072,65.769 84.732,68.428 87.048,68.428 89.273,70.653 89.365,70.653 U1.118
P2A_RJ45_P: RJ3.P2 U1.117 | length 14.1
  Top Layer w0.142: RJ3.P2 81.6,62.53 81.6,62.8 81.801,63 81.801,65.881 84.62,68.7 86.937,68.7 89.083,70.846 89.083,70.935 U1.117@89.776,71.631
P2B_RJ45_N: RJ3.P7 U1.121 | length 12.2
  Top Layer w0.142: v2@84.602,66.2 84.602,66.498 85.532,67.428 85.8,67.428 87.744,67.428 89.403,69.087 90.122,69.805 90.213,69.805 U1.121
  Bottom Layer w0.142: v2(84.779,66.2) 86.918,66.2 RJ3.P7
P2B_RJ45_P: RJ3.P4 U1.120 | length 12.4
  Top Layer w0.142: v2@84.33,66.2 84.33,66.611 85.419,67.7 85.8,67.7 87.632,67.7 89.211,69.279 89.93,69.997 89.93,70.088 U1.120@90.626,70.783
  Bottom Layer w0.142: v2@84.149,66.2 84.149,62.52 RJ3.P4
  other v2: 84.149,66.2
P2C_RJ45_N: RJ3.P6 U1.124 | length 10
  Top Layer w0.142: RJ3.P6 86.7,62.51 86.7,62.599 86.972,62.871 86.972,65.769 87.732,66.528 88.542,66.528 90.97,68.957 91.061,68.957 U1.124
P2C_RJ45_P: RJ3.P5 U1.123 | length 10.4
  Top Layer w0.142: RJ3.P5 85.499,64.758 85.499,64.199 85.801,63.9 86.401,63.9 86.7,64.199 86.7,65.881 87.62,66.8 88.43,66.8 90.78,69.15 90.78,69.239 U1.123
P2D_RJ45_N: RJ3.P9 U1.127 | length 8.2
  Top Layer w0.142: RJ3.P9 90.899,64.918 90.899,64.199 90.599,63.9 90,63.9 89.7,64.199 89.7,65.987 91.818,68.108 91.91,68.108 U1.127
P2D_RJ45_P: RJ3.P8 U1.126 | length 8.2
  Top Layer w0.142: RJ3.P8 89.101,62.65 89.428,62.978 89.428,66.102 91.628,68.299 91.628,68.39 U1.126
P3_LED_G+: R6.1 RJ4.11 | length 83.8
  Top Layer w0.2: R6.1 v1(84.4,94.4)
  Bottom Layer w0.2: v1(84.4,94.4) 84.399,93.899 110,93.899 110,60.9 100.899,60.9 100.899,52.5 95.796,52.5 RJ4.11
P3_LED_Y-: R2.1 RJ4.13 | length 73.7
  Top Layer w0.2: R2.1 v1(86.8,94.4)
  Bottom Layer w0.2: v1(86.8,94.4) 110.401,94.4 110.401,60.501 105.4,60.501 105.4,51.075 RJ4.13
P3A_RJ45_N: RJ4.P3 U1.3 | length 7.6
  Top Layer w0.142: U1.3 96.172,68.39 96.172,68.299 98.171,66.3 98.171,64.428 98.499,64.1 98.999,64.1 99.22,64.319 RJ4.P3
P3A_RJ45_P: RJ4.P2 U1.2 | length 7.7
  Top Layer w0.142: U1.2 95.89,68.108 95.979,68.108 97.899,66.188 97.899,62.899 97.701,62.701 97.701,62.528 RJ4.P2
P3B_RJ45_N: RJ4.P7 U1.5 | length 10.4
  Top Layer w0.142: U1.5 96.738,68.956 96.738,68.866 97.457,68.147 99.104,66.5 100.221,66.5 v2@100.4,66.679
  Bottom Layer w0.142: v2@100.401,66.678 101.92,66.678 103.68,64.918 RJ4.P7
  other v2: 100.4,66.679
P3B_RJ45_P: RJ4.P4 U1.4 | length 9.7
  Top Layer w0.142: U1.4 96.455,68.673 96.546,68.673 97.264,67.955 98.991,66.228 100.221,66.228 v2@100.4,66.049
  Bottom Layer w0.142: RJ4.P4 v2@100.401,66.048
  other v2: 100.4,66.049
P3C_RJ45_N: RJ4.P6 U1.8 | length 12.3
  Top Layer w0.142: U1.8 97.587,69.805 97.587,69.714 99.101,68.2 101.681,68.2 102.999,66.882 102.999,62.708 102.799,62.51 RJ4.P6
P3C_RJ45_P: RJ4.P5 U1.7 | length 12.6
  Top Layer w0.142: U1.7@96.609,70.217 97.305,69.523 97.394,69.523 98.989,67.928 101.567,67.928 102.728,66.767 102.728,64.227 102.4,63.9 101.801,63.9 101.501,64.199 101.501,64.918 RJ4.P5
P3D_RJ45_N: RJ4.P9 U1.10 | length 14.8
  Top Layer w0.142: U1.10 98.153,70.371 98.153,70.28 99.032,69.401 103.482,69.401 105.801,67.082 105.801,64.301 106.101,64.001 106.599,64.001 106.84,64.24 RJ4.P9
P3D_RJ45_P: RJ4.P8 U1.9 | length 14.7
  Top Layer w0.142: U1.9 97.869,70.087 97.96,70.087 98.92,69.127 103.368,69.127 105.527,66.968 105.527,62.927 105.301,62.701 105.301,62.548 RJ4.P8
R36_1: 3V.2 R36.1 | length 1.9
  Top Layer w0.3: R36.1@56.233,84.199 3V.2@58.151,84.199
R38_2: R3.1 R38.2 | length 1.6
  Top Layer w0.5: R38.2 61.8,92.286 R3.1
RJ1_P1: RJ1.P1 | length 3.6
  Top Layer w0.5: RJ1.P1 48.267,68.467 48.3,68.5
RJ2_P1: RJ2.P1 | length 3.3
  Top Layer w0.5: RJ2.P1 64.367,68.168 64.4,68.2
RJ3_P1: RJ3.P1 | length 3.3
  Top Layer w0.5: RJ3.P1 80.467,68.168 80.5,68.2
RJ4_P1: RJ4.P1 | length 12.1
  Top Layer w0.5: v2(106.1,68.2) 107.1,68.2
  Bottom Layer w0.5: RJ4.P1 99.543,67.9 106.1,67.9 v2(106.1,68.2)
SCL: R33.1 U1.87 U2.6 | length 19.5
  Top Layer w0.2: v1(77.9,84.4) 78.1,84.199 84.323,84.199 U1.87 ; v2(77.9,77.9) 77.935,77.865 U2.6 79.117,77.9 R33.1
  Bottom Layer w0.2: v2(77.9,77.9) v1(77.9,84.4)
SDA: R32.1 U1.88 U2.5 | length 21
  Top Layer w0.2: v1(77.3,76.6) U2.5 R32.1 ; v1(77.3,83.8) 84.157,83.8 U1.88
  Bottom Layer w0.2: v1(77.3,76.6) v1(77.3,83.8)
SFP_2: R15.2 SFP.2 | length 5.3
  Top Layer w0.2: R15.2 104.889,75.7 106.05,75.7 SFP.2
SFP_LED: R15.1 R16.2 U1.70 | length 26.1
  Top Layer w0.2: v2(90.4,87.4) 90.739,87.4 U1.70 ; v1@102.8,72.3 103.206,72.706 R16.2 ; v1(105,74.5) 105.406,74.906 R15.1
  Bottom Layer w0.2: v2(90.4,87.4) 90.399,84.7 v1(102.8,72.3) ; v1@102.8,72.3 v1(105,74.5)
SFPVCC: C13.2 C20.2 C26.2 CN2.15 CN2.16 R35.2 | length 28.9
  Top Layer w0.5: v2@118.199,89.899 CN2.16 ; v2(118.2,89.9) 118.2,89.6 v1(118.6,89.2) 119,89.6 v2(119,89.9) ; v2@118.999,89.899 CN2.15
  Top Layer w0.7: R35.2 101.945,95.045 C26.2 C13.2 107.055,95.1 v2(107.6,95.1) 108.2,95.1 v2(108.3,95.1) v1(109,95.1)
  Bottom Layer w0.7: v2(107.6,95.1) v2(107.6,95.1) v1(109,95.1) ; v1@108.999,95.096 114.998,95.096 118.6,91.497 118.6,89.889 v2@118.199,89.889 ; v2(118.2,89.9) v2(119,89.9) 118.6,89.5 v1(118.6,89.2) 118.6,89.5 v2(118.2,89.9)
SHIELD: RJ1.P10 RJ1.SHIELD0 RJ1.SHIELD1 RJ2.P10 RJ2.SHIELD0 RJ2.SHIELD1 RJ3.P10 RJ3.SHIELD0 RJ3.SHIELD1 RJ4.P10 RJ4.SHIELD0 RJ4.SHIELD1 | length 7.9
  Top Layer w0.5: 59.711,60.9 RJ1.P10 ; 75.811,59.9 RJ2.P10 ; 91.911,60.2 RJ3.P10 ; 107.8,60.7 108.011,60.911 RJ4.P10
  other v1: 55.8,48.5 80.6,48.5 102.6,51 87,51.4 102.6,55 52.5,56.2 55.9,56.2 70.1,56.2 82.8,59.1 107.4,59.1 90.1,59.9
U1_13: R1.2 U1.13 | length 4.8
  Top Layer w0.2: U1.13 99.02,71.2 101.4,71.2 102.267,70.333 R1.2
U1_45: RN4.5 U1.45 | length 10.5
  Top Layer w0.2: U1.45 107.25,89.67 RN4.5
U1_46: RN4.6 U1.46 | length 10.1
  Top Layer w0.2: U1.46 106.75,89.736 RN4.6@106.75,90.272
U1_47: RN4.7 U1.47 | length 9.7
  Top Layer w0.2: U1.47 106.25,89.801 RN4.7
U1_48: RN4.8 U1.48 | length 9.3
  Top Layer w0.2: U1.48 105.75,89.867 RN4.8
U1_49: RN1.5 U1.49 | length 8.7
  Top Layer w0.2: U1.49@99.154,83.837 104.55,89.233 RN1.5
U1_50: RN1.6 U1.50 | length 8.3
  Top Layer w0.2: U1.50@98.871,84.119 104.05,89.298 RN1.6@104.05,90.272
U1_51: RN1.7 U1.51 | length 7.9
  Top Layer w0.2: U1.51 103.55,89.364 RN1.7
U1_52: RN1.8 U1.52 | length 7.6
  Top Layer w0.2: U1.52 103.05,89.43 RN1.8
U1_53: RN2.5 U1.53 | length 6.9
  Top Layer w0.2: U1.53 101.85,88.796 RN2.5
U1_54: RN2.6 U1.54 | length 6.5
  Top Layer w0.2: U1.54 101.35,88.861 RN2.6
U1_55: RN2.7 U1.55 | length 6.1
  Top Layer w0.2: U1.55 100.85,88.927 RN2.7
U1_56: RN2.8 U1.56 | length 5.8
  Top Layer w0.2: U1.56 100.35,88.993 RN2.8
U1_60: R14.2 U1.60 | length 4.6
  Top Layer w0.2: U1.60 99.2,90.105 R14.2
U1_63: L1.1 U1.63 U1.64 | length 13.8
  Top Layer w0.2: L1.1 96.299,90.9 95.9,90.501 95.9,89.068 94.912,88.078 95.194,87.796 96.3,88.902 L1.1
  Top Layer w0.25: 95.047,87.943 96.101,88.995 96.101,90.501 96.299,90.699 L1.1
U1_72: R2.2 U1.72 | length 8.5
  Top Layer w0.2: R2.2 86.8,90.208 U1.72
U1_73: R4.2 U1.73 | length 9.1
  Top Layer w0.2: R4.2 85.6,90.843 U1.73
U1_74: R5.2 R6.2 U1.74 | length 11
  Top Layer w0.2: R5.2 R6.2 84.4,91.477 U1.74
U1_75: R7.2 R19.2 U1.75 | length 12.4
  Top Layer w0.2: R19.2 R7.2 ; R7.2 82.667,92.2 83.111,92.2 U1.75
U1_76: R8.2 U1.76 | length 13.4
  Top Layer w0.2: R8.2 80.668,91.799 82.946,91.799 U1.76
U1_77: R9.2 U1.77 | length 14.5
  Top Layer w0.2: R9.2 79.868,91.4 82.781,91.4 U1.77@89.494,84.684
U1_78: R10.2 U1.78 | length 15.5
  Top Layer w0.2: R10.2 79.068,90.999 82.613,90.999 U1.78
U1_79: R11.2 R12.2 U1.79 | length 17.8
  Top Layer w0.2: R12.2 R11.2 ; R11.2 78.268,90.6 82.448,90.6 U1.79
U1_80: R13.2 R17.2 U1.80 | length 20
  Top Layer w0.2: R13.2 R17.2 ; R17.2 76.266,90.199 82.283,90.199 U1.80@88.646,83.836
U1_81: R18.2 U1.81 | length 21
  Top Layer w0.2: R18.2@71.201,92.868 74.267,89.8 82.118,89.8 U1.81
U2_7: R34.1 U2.7 | length 2
  Top Layer w0.2: U2.7 79.147,79.2 R34.1
U3_1: C12.1 U3.1 | length 1.9
  Top Layer w0.7: U3.1 C12.1
U3_3: C11.2 R38.1 R39.2 U3.3 | length 5.7
  Top Layer w0.5: C11.2 57.437,93.717 58.132,93.022 U3.3 60.198,93.022 R38.1 R39.2
U3_4: R37.2 U3.4 | length 1.7
  Top Layer w0.5: R37.2 55.315,93.589 U3.4
VBUS: C19.1 C36.2 H1.2 R37.1 U3.5 USB1.A9 USB1.B9 | length 32.5
  Top Layer w0.5: R37.1 54.482,94.439 C36.2
  Top Layer w0.7: C19.1 54,79 54,85.2 ; C19.1 54.93,79.93 H1.2 ; C36.2 54.537,92.072 U3.5 ; C36.2 52.017,92.017 50.899,90.9 50.899,86.701 ; 50.899,86.701 50.899,85.299 51.699,84.499 52.499,84.499 53.299,84.499 54,85.2 ; 50.899,86.701 51.699,87.499 52.499,87.499 53.299,87.499 54,86.8 54,85.2
XTALI: C1.1 U1.84 | length 9.9
  Top Layer w0.2: C1.1 80.64,85.51 ; 80.641,85.51 80.851,85.3 83.2,85.3 cw(c83.2,81.147) 86.136,84.084 U1.84
XTALO: C2.2 U1.83 X1.3 | length 9.8
  Top Layer w0.2: C2.2 X1.3 cw(c81.959,85.628) 83.558,87.227 U1.83
pads on no net: CN2. CN2.2 CN2.4 CN2.5 CN2.7 CN2.8 RJ1. RJ2. RJ3. RJ4. U1.15 U1.16 U1.19 U1.22 U1.23 U1.25 U1.26 U1.28 U1.29 U1.30 U1.31 U1.71 USB1.A5 USB1.B5

## Polygon pours and split planes (outlines as drawn)
SHIELD on Bottom Layer (solid): 44.45,61.1 110.35,61.1 110.35,43.7 109.35,42.7 46.45,42.7 43.85,45.3 42.55,53.9
GND on Bottom Layer (solid): 39.2,104.3 124.7,104.3 130.8,98.2 130.8,47.9 122.7,39.8 39.8,39.8 38.1,41.5
SHIELD on Top Layer (solid): 44.45,61.1 110.35,61.1 110.35,43.7 109.35,42.7 46.45,42.7 43.85,45.3
GND on Top Layer (solid): 40.4,102.6 125.9,102.6 132,96.5 132,46.2 123.9,38.1 41,38.1 39.3,39.8

## Keep-outs
Keep-Out Layer:
  lines w0.254: 45.999,48.699 ccw(c47.499,48.699) 47.499,47.199 ; 45.999,95.201 cw(c47.499,95.201) 47.499,96.701 ; 125.599,47.199 ccw(c125.599,48.699) 127.099,48.699 ; 125.599,96.701 cw(c125.599,95.201) 127.099,95.201

## Silkscreen, mask and mechanical layers (free items; w line width, h text height)
Top Overlay:
  text "POWER" at 61.2,83.5 h2
  text "FAN+" at 57.4,79.4 h1.5
  text "RTL8367S" at 58.6,76.2 h2.3
  text "SFP" at 107.7,74.1 h2
  text "4GE+SFP SWITCH" at 58.6,73.514 h2.3
  text "JLCJLCJLCJL" at 121.3,73 h2 r90
  text "1000M/100M/10M" at 58.4,70.6 h2.3
  text "RTL8367S" at 114,58 h2 r90
  text "4GE+SFP SWITCH" at 116.4,57.9 h2 r90
  text "Finish Product V1.1" at 121.804,57.8 h2 r90
  text "Designed By:WJXN" at 124.3,57.8 h2 r90
Document:
  text "差分：间距0.13/铺铜间距0.13" at 133.921,65.7 h2.03
  text "差分：线宽0.142/R=100" at 133.9,62.6 h2.03 r359